# EAGLE board LightRetaggioSchema_legacy (EAGLE 9.2.2)
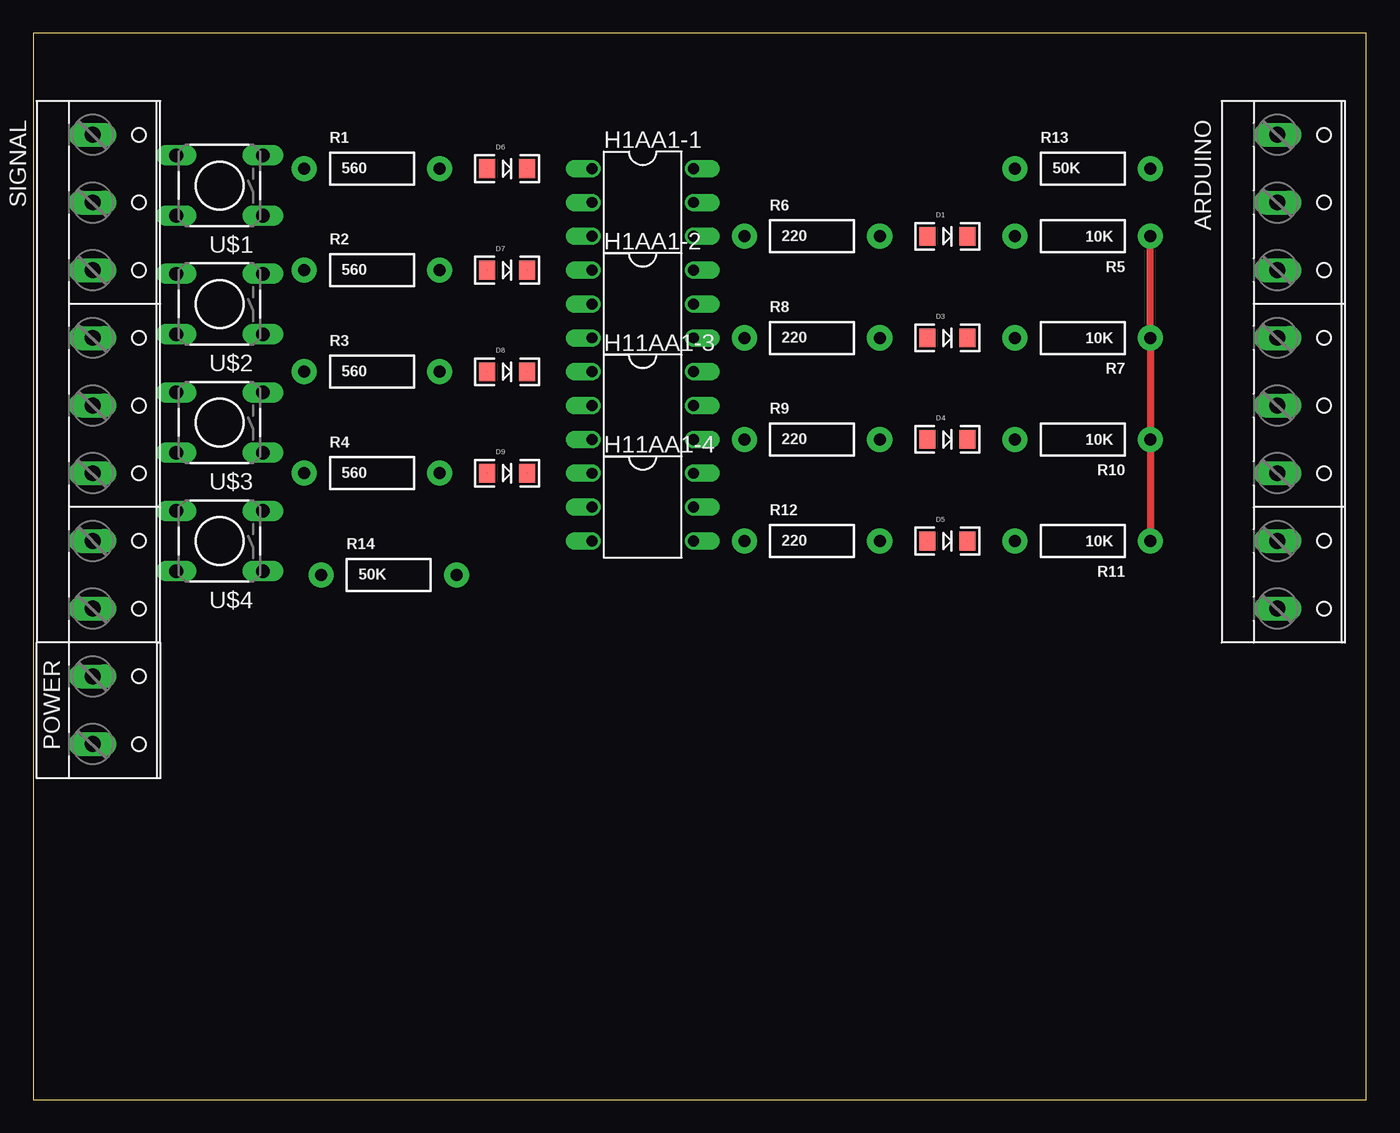
[diagram p0: board, top side]
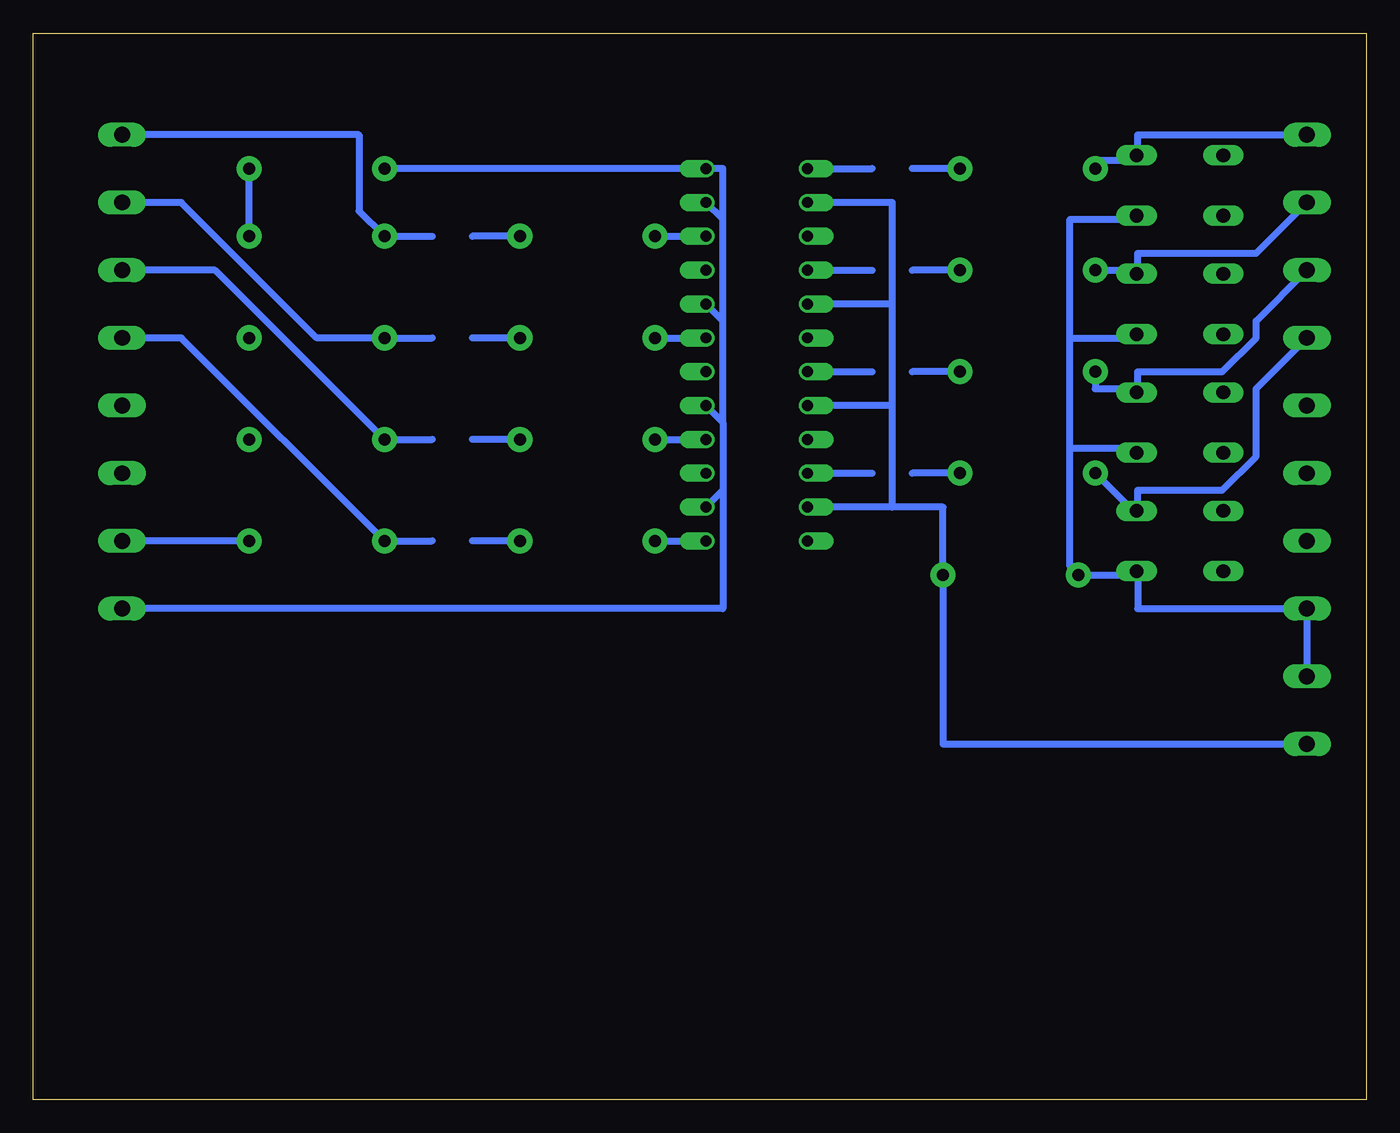
[diagram p1: board, bottom side, seen from below]

Size 100 x 80 mm. Coordinates in mm from the lower left corner, seen from the top.
Outline: 0,0 100,0 100,80 0,80 0,0
Copper layers (1*16): Top 0.035mm / dielectric 1.5mm / Bottom 0.035mm
Design rules "default": minimum track width 10mil, minimum drill 24mil, track to track 8mil, track to pad 8mil, pad to pad 8mil, via to via 8mil, smd to smd 8mil, copper to edge 40mil, drill to drill 8mil, minimum pad ring 10mil, minimum via ring 8mil, stop-mask expansion 4mil, vias tented up to drill 0mil, thermal gap 10mil
Net classes: 0 default: width 0.508 mm

## Footprints (pad centres in the part's own frame; a part is rotated, then mirrored left to right if it is on the bottom)
W237-8P = drill 1.194 long: 1 -17.78,-0.635; 2 -12.7,-0.635; 3 -7.62,-0.635; 4 -2.54,-0.635; 5 2.54,-0.635; 6 7.62,-0.635; 7 12.7,-0.635; 8 17.78,-0.635
LED-1206 = smd 1.2 x 1.4: A -1.5,0; C 1.5,0
DIL06 = drill 0.813 offset: 1 -2.54,-3.81; 2 0,-3.81; 3 2.54,-3.81; 4 2.54,3.81; 5 0,3.81; 6 -2.54,3.81
W237-132 = drill 1.194 long: 1 -2.54,-0.635; 2 2.54,-0.635
AXIAL-0.4 = drill 0.9 pad 1.88: P$1 -5.08,0; P$2 5.08,0
TAC-SWITCH-PTH = drill 1.016 pad 1.524 long: 1 -3.251,2.261; 2 3.251,2.261; 3 -3.251,-2.261; 4 3.251,-2.261

## Placement (x,y rotation side)
ARDUINO  [W237-8P]  93.98,54.61 270 top
D1  RED 1,8V  [LED-1206]  68.58,64.77 0 top
D3  RED 1,8V  [LED-1206]  68.58,57.15 0 top
D4  RED 1,8V  [LED-1206]  68.58,49.53 0 top
D5  RED 1,8V  [LED-1206]  68.58,41.91 0 top
D6  GREEN 2,0V  [LED-1206]  35.56,69.85 0 top
D7  GREEN 2,0V  [LED-1206]  35.56,62.23 0 top
D8  GREEN 2,0V  [LED-1206]  35.56,54.61 0 top
D9  GREEN 2,0V  [LED-1206]  35.56,46.99 0 top
H1AA1-1  IL250  [DIL06]  45.72,67.31 270 top
H1AA1-2  IL250  [DIL06]  45.72,59.69 270 top
H11AA1-3  IL250  [DIL06]  45.72,52.07 270 top
H11AA1-4  IL250  [DIL06]  45.72,44.45 270 top
POWER  [W237-132]  5.08,29.21 270 top
R1  560  [AXIAL-0.4]  25.4,69.85 0 top
R2  560  [AXIAL-0.4]  25.4,62.23 0 top
R3  560  [AXIAL-0.4]  25.4,54.61 0 top
R4  560  [AXIAL-0.4]  25.4,46.99 0 top
R5  10K  [AXIAL-0.4]  78.74,64.77 180 top
R6  220  [AXIAL-0.4]  58.42,64.77 0 top
R7  10K  [AXIAL-0.4]  78.74,57.15 180 top
R8  220  [AXIAL-0.4]  58.42,57.15 0 top
R9  220  [AXIAL-0.4]  58.42,49.53 0 top
R10  10K  [AXIAL-0.4]  78.74,49.53 180 top
R11  10K  [AXIAL-0.4]  78.74,41.91 180 top
R12  220  [AXIAL-0.4]  58.42,41.91 0 top
R13  50K  [AXIAL-0.4]  78.74,69.85 0 top
R14  50K  [AXIAL-0.4]  26.67,39.37 0 top
SIGNAL  [W237-8P]  5.08,54.61 270 top
U$1  TACTILE-SWITCH-PTH  [TAC-SWITCH-PTH]  13.97,68.58 180 top
U$2  TACTILE-SWITCH-PTH  [TAC-SWITCH-PTH]  13.97,59.69 180 top
U$3  TACTILE-SWITCH-PTH  [TAC-SWITCH-PTH]  13.97,50.8 180 top
U$4  TACTILE-SWITCH-PTH  [TAC-SWITCH-PTH]  13.97,41.91 180 top

## Library data of the parts
ARDUINO POWER SIGNAL = con-wago-508; OC_FARNELL: unknown; OC_NEWARK: unknown
D1 D3-D9 = SparkFun-LED; PROD_ID: DIO-09912
H1AA1-1 H1AA1-2 H11AA1-3 H11AA1-4 = optocoupler; MF: VISHAY/TELEFUNKEN; MPN: IL250; OC_FARNELL: 1469559; OC_NEWARK: 58K1705
R1-R14 = SparkFun-Passives
U$1-U$4 = GeekAmmo

## Nets
+5VARD: ARDUINO.8 H1AA1-1.5 H1AA1-2.5 H11AA1-3.5 H11AA1-4.5 R13.P$1
CADUTA0,7V: D6.C H1AA1-1.1
DIG1: ARDUINO.1 D1.C R5.P$2
DIG2: ARDUINO.2 D3.C R7.P$2
DIG3: ARDUINO.3 D4.C R10.P$2
DIG4: ARDUINO.4 D5.C R11.P$2
GND_ARD: ARDUINO.7 R5.P$1 R7.P$1 R10.P$1 R11.P$1 R13.P$2
GND_SIG: H1AA1-1.2 H1AA1-2.2 H11AA1-3.2 H11AA1-4.2 POWER.2 R14.P$2
N$4: D9.C H11AA1-4.1
N$5: D8.C H11AA1-3.1
N$6: D7.C H1AA1-2.1
N$9: H1AA1-1.4 R6.P$1
N$10: D1.A R6.P$2
N$11: D4.A R9.P$2
N$12: D3.A R8.P$2
N$13: H1AA1-2.4 R8.P$1
N$14: D5.A R12.P$2
N$15: H11AA1-4.4 R12.P$1
N$16: D8.A R3.P$2
N$17: H11AA1-3.4 R9.P$1
N$18: D9.A R4.P$2
N$19: D7.A R2.P$2
N$20: D6.A R1.P$2
S$1: R1.P$1
SIG1: SIGNAL.1
SIG2: R2.P$1 SIGNAL.2 U$2.3
SIG3: R3.P$1 SIGNAL.3 U$3.3
SIG4: R4.P$1 SIGNAL.4 U$4.3
VCC+12_SIG: POWER.1 R14.P$1 SIGNAL.8 U$1.1 U$2.1 U$3.1 U$4.1

## Tracks (layer width: path | path; a pad name or v marks a point on that pad's centre or on a via)
+5VARD
  Bottom 0.508: 48.26,45.72 H11AA1-4.5 | 48.26,50.8 48.26,45.72 | H11AA1-3.5 48.26,50.8 | 48.26,58.42 H1AA1-2.5 | 48.26,50.8 48.26,58.42 | 48.26,66.04 H1AA1-1.5 | 48.26,58.42 48.26,66.04 | ARDUINO.8 48.26,36.83 48.26,45.72 | R13.P$1 48.26,69.85 48.26,66.04
CADUTA0,7V  (1 unrouted)
  Bottom 0.508: H1AA1-1.1 D6.C
DIG1  (1 unrouted)
  Bottom 0.508: D1.C R5.P$2 75.56,66.67 75.56,72.39 ARDUINO.1
DIG2  (1 unrouted)
  Bottom 0.508: D3.C R7.P$2 78.74,57.15 88.9,67.31 ARDUINO.2
DIG3  (1 unrouted)
  Bottom 0.508: D4.C R10.P$2 86.36,62.23 ARDUINO.3
DIG4  (1 unrouted)
  Bottom 0.508: D5.C R11.P$2 88.9,57.15 ARDUINO.4
GND_ARD
  Top 0.508: R5.P$1 R7.P$1 R10.P$1 R11.P$1
  Bottom 0.508: R11.P$1 ARDUINO.7 | R5.P$1 R13.P$2
GND_SIG
  Bottom 0.508: 35.56,44.45 31.75,44.45 R14.P$2 31.75,26.67 POWER.2 | 35.56,44.45 H11AA1-4.2 | 35.56,52.07 H11AA1-3.2 | 35.56,44.45 35.56,52.07 | 35.56,59.69 H1AA1-2.2 | 35.56,52.07 35.56,59.69 | H1AA1-1.2 35.56,67.31 35.56,59.69
N$4  (1 unrouted)
  Bottom 0.508: H11AA1-4.1 D9.C
N$5  (1 unrouted)
  Bottom 0.508: H11AA1-3.1 D8.C
N$6  (1 unrouted)
  Bottom 0.508: H1AA1-2.1 D7.C
N$9
  Bottom 0.508: R6.P$1 H1AA1-1.4
N$10  (1 unrouted)
  Bottom 0.508: R6.P$2 D1.A
N$11  (1 unrouted)
  Bottom 0.508: R9.P$2 D4.A
N$12  (1 unrouted)
  Bottom 0.508: R8.P$2 D3.A
N$13
  Bottom 0.508: R8.P$1 H1AA1-2.4
N$14  (1 unrouted)
  Bottom 0.508: R12.P$2 D5.A
N$15
  Bottom 0.508: R12.P$1 H11AA1-4.4
N$16  (1 unrouted)
  Bottom 0.508: R3.P$2 D8.A
N$17
  Bottom 0.508: R9.P$1 H11AA1-3.4
N$18  (1 unrouted)
  Bottom 0.508: R4.P$2 D9.A
N$19  (1 unrouted)
  Bottom 0.508: R2.P$2 D7.A
N$20  (1 unrouted)
  Bottom 0.508: R1.P$2 D6.A
S$1
  Bottom 0.508: R1.P$1 20.32,70.48 17.78,70.48
SIG1  (via drill 0.35)
  Bottom 0.508: SIGNAL.1 17.14,72.39 v17.14,71.12 17.78,70.48
SIG2
  Bottom 0.508: R2.P$1 17.78,62.23 U$2.3 17.14,62.23 17.14,63.5 8.26,63.5 SIGNAL.2
SIG3
  Bottom 0.508: R3.P$1 20.32,53.34 17.78,53.34 U$3.3 17.14,53.34 17.14,54.61 10.79,54.61 8.26,57.15 8.26,58.42 SIGNAL.3
SIG4
  Bottom 0.508: R4.P$1 17.78,44.45 U$4.3 17.14,44.45 17.14,45.72 10.79,45.72 8.26,48.26 8.26,53.34 SIGNAL.4
VCC+12_SIG
  Bottom 0.508: POWER.1 SIGNAL.8 17.14,36.83 17.14,39.37 U$4.1 17.78,39.37 R14.P$1 22.23,40.01 22.23,48.9 | 22.23,48.9 17.78,48.9 U$3.1 | 22.23,57.15 17.78,57.15 U$2.1 | 22.23,48.9 22.23,57.15 | 22.23,57.15 22.23,66.04 17.78,66.04 U$1.1